# Altium PCB PCB.PcbDoc
Units mm, origin at the board's own origin, x right, y up, seen from the top; angles counter-clockwise.
Board outline 49.91 x 26.92 mm, 2 copper layers (Top Layer, Bottom Layer); 20 components, 16 nets, 48 pads, 3 vias.
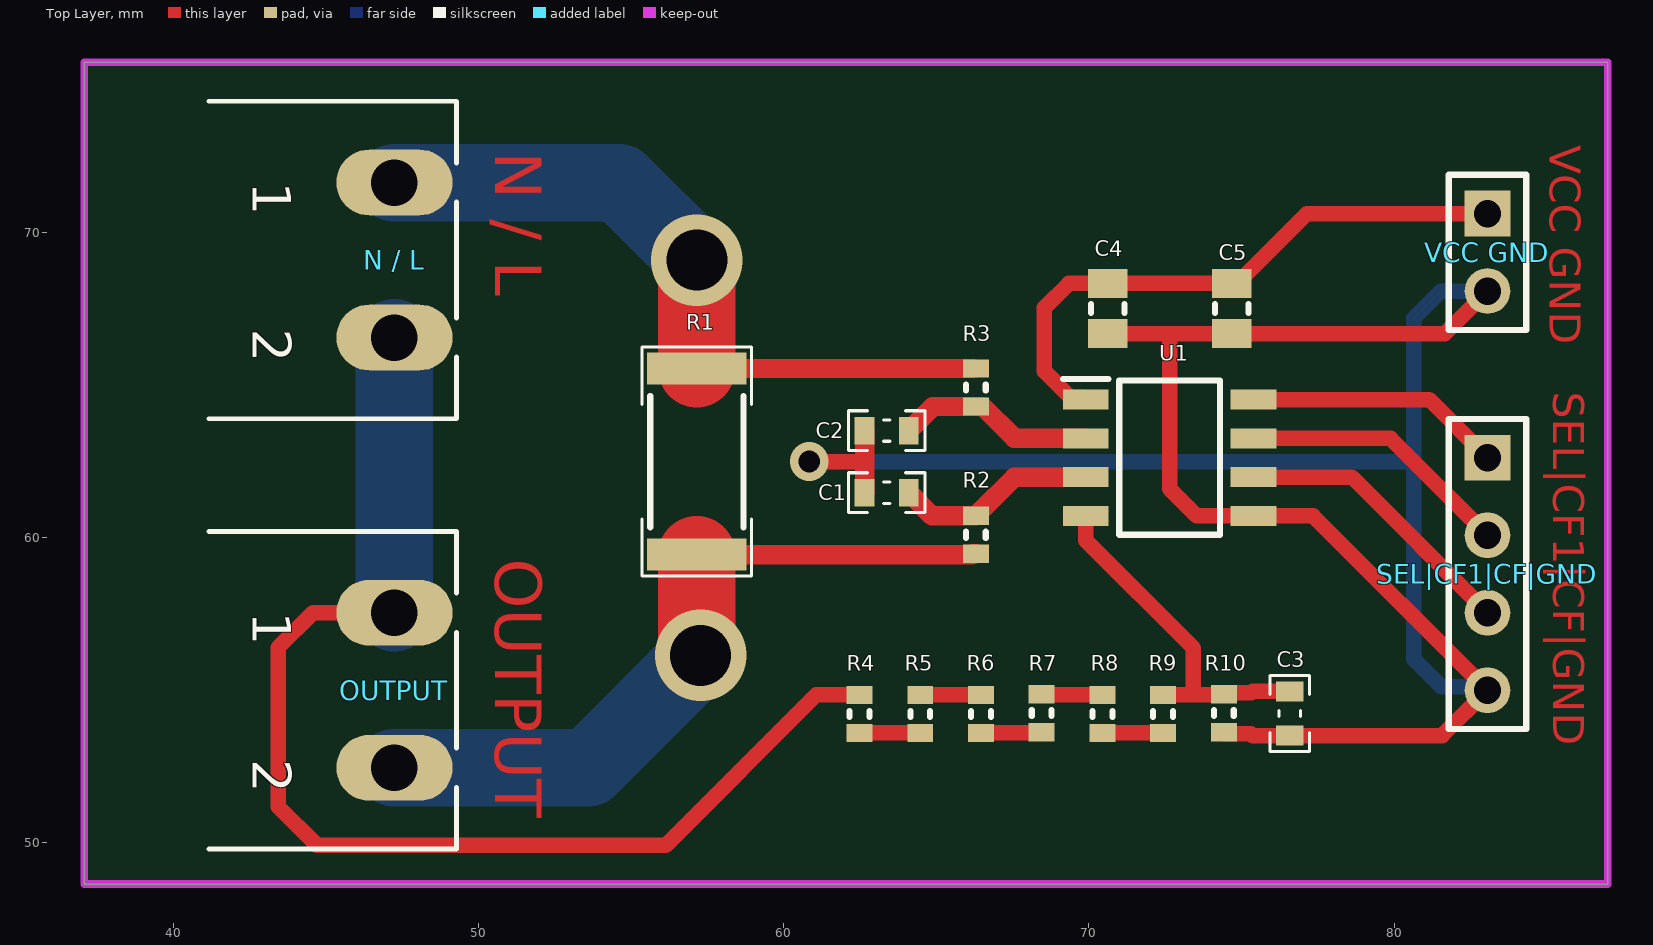
[diagram p0: Top Layer view]
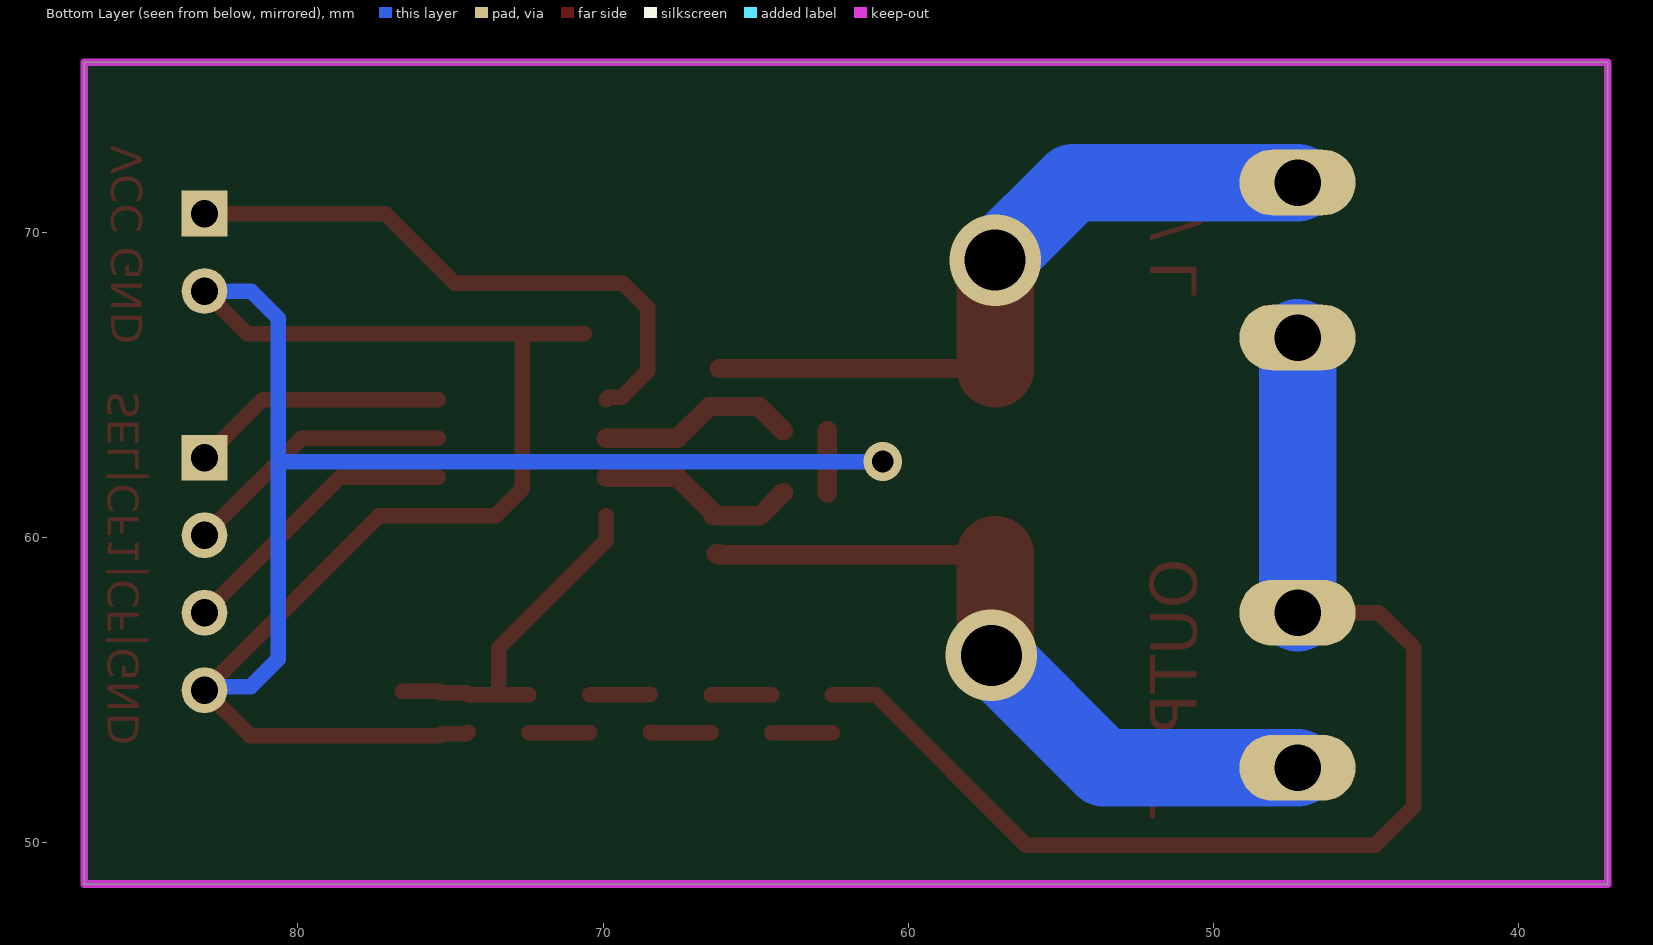
[diagram p1: Bottom Layer view, seen from below]
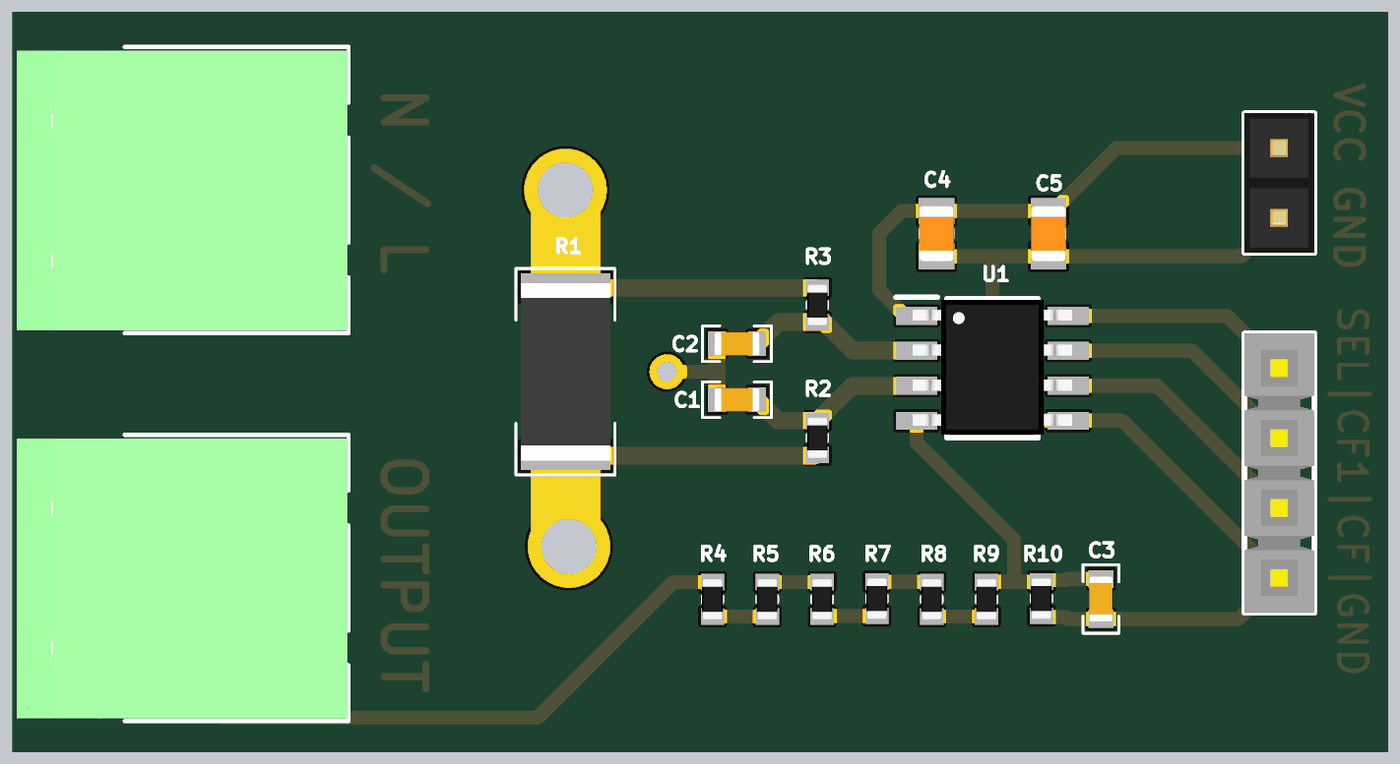
[diagram p2: 3D render of the assembled board from above, using the file's embedded part models]

## Layer stack, top to bottom
Top Solder: solder mask 0.0102, Solder Resist, Dk 3.5
Top Layer: signal copper 0.0356
Dielectric 1: dielectric 0.32, FR-4, Dk 4.8
Bottom Layer: signal copper 0.0356
Bottom Solder: solder mask 0.0102, Solder Resist, Dk 3.5

## Board outline
37.084,48.641 37.084,75.565 86.995,75.565 86.995,48.641

## Design rules (kind name [scope] priority, off if disabled: settings)
Clearance [All] p1: gap=0.254 ignorepadtopadclearanceinfootprint=FALSE except(0: Arc-Hole Track-Hole SMDPad-Hole THPad-Hole Via-Hole Fill-Hole Poly-Hole Region-Hole Text-Hole)
PolygonConnect [All] p1: connectstyle=Relief reliefconductorwidth=0.254 reliefentries=4 polygonreliefangle="90 Angle" airgapwidth=0.254
RoutingVias [All] p1: holewidth=0.711 width=1.27 viastyle="Through Hole" minholewidth=0.711 minwidth=1.27 maxholewidth=2 maxwidth=3
SolderMaskExpansion [All] p1: expansion=0.102 istentingtop=FALSE
Width [All] p1: maxlimit=5.08 minlimit=0.254 preferedwidth=0.508
30 further rules are at their usual default settings.

## Components (designator, comment, footprint, x,y, rotation, side; value= is the part's Value field where it differs from the comment)
C1 "33nF" CAP0603 63.373,61.468 r0 top value=100nF
C2 "33nF" CAP0603 63.373,63.5 r0 top value=100nF
C3 "100nF" CAP0603 76.581,54.229 r90 top
C4 "100nF" CAP805 70.612,66.675 r90 top
C5 "10uF" CAP805 74.676,66.675 r90 top value=100nF
"N / L" "PHOENIX" "MSTB 2,5/2-G-5,08" 47.244,69.088 r270 top
OUTPUT "PHOENIX" "MSTB 2,5/2-G-5,08" 47.244,54.991 r270 top
R1 "1m" RES2512 57.15,62.484 r270 top
R2 "1K" RES0603_(1608X06L) 66.294,60.706 r270 top
R3 "1K" RES0603_(1608X06L) 66.294,64.288 r90 top
R4 "470K" RES0603_(1608X06L) 62.484,54.838 r270 top
R5 "470K" RES0603_(1608X06L) 64.473,53.594 r90 top
R6 "470K" RES0603_(1608X06L) 66.462,54.838 r270 top
R7 "470K" RES0603_(1608X06L) 68.451,53.62 r90 top
R8 "470K" RES0603_(1608X06L) 70.44,54.838 r270 top
R9 "470K" RES0603_(1608X06L) 72.429,53.594 r90 top
R10 "1K" RES0603_(1608X06L) 74.419,53.62 r90 top
SEL|CF1|CF|GND "Header 4" HDR1X4 83.058,62.611 r270 top (schematic designator SEL/CF1/CF/GND)
U1 "HLW8012" SOIC127P600X170-8N 72.644,62.611 r0 top
"VCC GND" "Header 2" HDR1X2 83.058,70.612 r270 top

## Footprints (in the part's own frame and the unit in brackets; to place one, negate y for a bottom-side part, rotate by r counter-clockwise, add the part's x,y. Pads: shape width x height; smd on the part's side, far side on the other; paste and mask are expansions set on the pad)
CAP0603 [mm] "Chip Capacitor, 2-Leads, Body 1/60x0/80mm, IPC Medium Density DESIGNER:ABBAS BASEREH"
  rect 0.65x0.9 smd: 1(-0.725,0) 2(0.725,0)
  silkscreen extent -1.25,-0.65 1.25,0.65, body extent -0.82,-0.43 0.82,0.43, height 0.4
CAP805 [mm]
  rect 0.95x1.3 smd: 1(0,0) 2(1.65,0)
  silkscreen extent 0.67,-0.55 0.97,0.55, body extent -0.19,-0.63 1.84,0.63, height 0.65
HDR1X2 [mm] "Connector; Header; 2 Position"
  rect 1.5x1.5 hole 0.9: 1(0,0)
  round 1.5 hole 0.9: 2(2.54,0)
  silkscreen extent -1.27,-1.27 3.81,1.27, body extent -1.27,-1.28 3.81,1.26, height 8.79
HDR1X4 [mm] "Connector; Header; 4 Position"
  rect 1.5x1.5 hole 0.9: 1(0,0)
  round 1.5 hole 0.9: 2(2.54,0) 3(5.08,0) 4(7.62,0)
  silkscreen extent -1.27,-1.27 8.89,1.27, body extent -1.27,-1.28 8.89,1.26, height 8.38
"MSTB 2,5/2-G-5,08" [mil] "Header, Nominal current: 12 A Rated voltage (III/2): 320 V Number of positions: 2 Pitch: 5.08 mm Color: green Contact surface: Tin Assembly: Soldering DESIGNER:ABBAS BASEREH"
  oval 85x150 hole 60: 1(-100,0) 2(100,0)
  silkscreen extent -205,-240 205,80, body extent -199,-394 201,79, height 340
RES0603_(1608X06L) [mm] "Chip Resistor, 2-Leads, Body 1.6x0.8mm, IPC High Density _ (0.063W)"
  rect 0.6x0.85 smd: 1(0,0) 2(1.244,0)
  silkscreen extent 0.52,-0.33 0.72,0.33, body extent -0.14,-0.38 1.38,0.38, height 0.45
RES2512 [mm] "Chip Resistor, 2-Leads, Body 6/40x3/20mm, IPC Medium Density DESIGNER:ABBAS BASEREH"
  rect 1.05x3.25 smd: 1(-3.05,0) 2(3.05,0)
  silkscreen extent -3.75,-1.8 3.75,1.8, body extent -3.22,-1.63 3.22,1.63, height 0.7
SOIC127P600X170-8N [mm]
  rect 1.5x0.65 smd: 1(-2.75,1.905) 2(-2.75,0.635) 3(-2.75,-0.635) 4(-2.75,-1.905) 5(2.75,-1.905) 6(2.75,-0.635) 7(2.75,0.635) 8(2.75,1.905)
  silkscreen extent -3.5,-2.52 1.65,2.58, body extent -2.89,-2.41 2.89,2.49, height 1.45

## Part data
C1 C2 C3 C4 C5: library part "CAP SMD PACKAGE", "TOTAL CAPACITOR SMD PACK", Data=2017-3-10, Desc.="CAP SMD TOTAL PACKAGES", Designer="Abbas Basereh"
"N / L" OUTPUT: library part CON_Phoenix_MSTB_02, "2 Pitch: 5.08 mm Color: green Contact surface: Tin Assembly", Manufacturer="PHOENIX CONTACT", Max Current="12 A", Voltage="320 V", Category=Connector, ComponentLink1Description="Header, Nominal current: 12 A Rated voltage (III/2): 320 V Number of positions: 2 Pitch: 5.08 mm Color: green Contact surface: Tin Assembly: Soldering  DESIGNER:ABBAS BASEREH", ComponentLink2Description=Reference, Connector type="PCB Terminal Block", Designer="ABBAS BASEREH", Mounting Technology=Through-Hole, PART.NO=PHOENIX, Pin Count=2, Positions=2, Revision 1=2017-3-1, Status=Unreleased
R1 R2 R3 R4 R5 R6 R7 R8 R9 R10: library part "RES SMD PACKAGE", "TOTAL SMD RESISTOR PACK", Data=2017-3-10, Desc.="RES SMD PAKAGES", Designer="Abbas Basereh"
SEL|CF1|CF|GND: "Header, 4-Pin", LatestRevisionDate=17-Jul-2002, LatestRevisionNote="Re-released for DXP Platform.", Publisher="Altium Limited"
U1: "single phase energy monitor chip", Manufacturer_Name=Hilwi, Datasheet Link=https://www.datasheet4u.com/datasheet-parts/HLW8012-datasheet.php?id=1157559, Geometry.Height=1.7mm, Manufacturer_Part_Number=HLW8012
"VCC GND": "Header, 2-Pin", LatestRevisionDate=17-Jul-2002, LatestRevisionNote="Re-released for DXP Platform.", Publisher="Altium Limited"

## Via types
v1: diameter 3, hole 2, Top Layer to Bottom Layer, 2 vias
v2: diameter 1.27, hole 0.711, Top Layer to Bottom Layer, 1 vias

## Nets (pads, with @x,y where several pads share a name; then routed paths per layer and width w, separated by ;. In a path a pad name is that pad's centre, name@x,y a point inside that pad or via, vN(x,y) a via of type N, cw(c..) or ccw(c..) an arc to the next point about the centre after c; other vN are vias at no path point)
GND: "VCC GND.2" C1.1 C2.1 C3.1 C4.1 C5.1 R10.1 SEL|CF1|CF|GND.4 U1.5 | length 81
  Top Layer w0.508: v2(60.833,62.484) 62.648,62.484 ; C4.1 72.644,66.675 ; R10.1 74.465,53.574 75.299,53.574 75.369,53.504 C3.1 81.571,53.504 SEL|CF1|CF|GND.4 77.343,60.706 U1.5 73.533,60.706 72.644,61.595 72.644,66.675 ; 83.058,68.072 81.661,66.675 C5.1 72.644,66.675
  Top Layer w0.635: C1.1 62.648,62.484 C2.1
  Bottom Layer w0.508: v2(60.833,62.484) 80.645,62.484 ; SEL|CF1|CF|GND.4 82.943,55.106 81.546,55.106 80.645,56.007 80.645,62.484 ; 83.058,68.072 81.534,68.072 80.645,67.183 80.645,62.484
L-IN: "N / L.2" OUTPUT.1 R4.1 | length 40.1
  Top Layer w0.508: OUTPUT.1 44.577,57.531 43.434,56.388 43.434,51.181 44.703,49.912 56.135,49.912 61.061,54.838 R4.1
  Bottom Layer w2.54: OUTPUT.1 47.244,66.548
L-OUT: OUTPUT.2 R1.2 R2.2 | length 24.1
  Top Layer w0.635: R1.2 66.176,59.434 66.204,59.462 R2.2
  Top Layer w2.54: R1.2 57.15,56.261 v1(57.277,56.134)
  Bottom Layer w2.54: OUTPUT.2 53.594,52.451 v1(57.277,56.134)
N: "N / L.1" R1.1 R3.2 | length 23.5
  Top Layer w0.635: R1.1 R3.2@66.186,65.534
  Top Layer w2.54: R1.1 v1(57.15,69.088)
  Bottom Layer w2.54: 47.244,71.628 54.61,71.628 v1(57.15,69.088)
NetC1_2: C1.2 R2.1 U1.3 | length 6.6
  Top Layer w0.635: C1.2 64.86,60.706 R2.1 ; R2.1@66.402,60.724 66.402,60.813 67.557,61.968 69.886,61.968 U1.3
NetC2_2: C2.2 R3.1 U1.2 | length 6.6
  Top Layer w0.635: C2.2 64.886,64.288 R3.1@66.384,64.288 ; R3.1 66.522,64.288 67.557,63.254 69.886,63.254 U1.2
NetC3_2: C3.2 R9.2 R10.2 U1.4 | length 11.5
  Top Layer w0.508: U1.4 69.894,59.9 73.424,56.37 73.424,54.851 ; R9.2 72.442,54.851 73.424,54.851 ; C3.2 75.369,54.954 75.325,54.91 74.465,54.91 R10.2 74.406,54.851 73.424,54.851
NetR4_2: R4.2 R5.1 | length 2
  Top Layer w0.508: R4.2 R5.1
NetR5_2: R5.2 R6.1 | length 2
  Top Layer w0.508: R5.2 R6.1
NetR6_2: R6.2 R7.1 | length 2
  Top Layer w0.508: R6.2 66.475,53.607 68.438,53.607 R7.1
NetR7_2: R7.2 R8.1 | length 2
  Top Layer w0.508: R7.2 68.464,54.851 70.428,54.851 R8.1
NetR8_2: R8.2 R9.1 | length 2
  Top Layer w0.508: R8.2 R9.1
NetSEL: SEL|CF1|CF|GND.3 U1.6 | length 9.5
  Top Layer w0.508: U1.6 78.613,61.976 SEL|CF1|CF|GND.3
NetSEL: SEL|CF1|CF|GND.2 U1.7 | length 9
  Top Layer w0.508: U1.7 79.883,63.246 SEL|CF1|CF|GND.2
NetSEL: SEL|CF1|CF|GND.1 U1.8 | length 8.5
  Top Layer w0.508: U1.8 81.153,64.516 SEL|CF1|CF|GND.1
VCC: "VCC GND.1" C4.2 C5.2 U1.1 | length 19.6
  Top Layer w0.508: U1.1 69.823,64.587 69.398,64.587 68.536,65.449 68.536,67.52 69.341,68.325 C4.2 C5.2 74.851,68.325 77.138,70.612 83.058,70.612

## Keep-outs
Keep-Out Layer:
  the board outline again, w0.254

## Text inside footprints (layer, text, board x,y; h text height)
"N / L": Top Overlay "2" at 42.609,66.834 h1.27 r270; Top Overlay "1" at 42.609,71.66 h1.27 r270
OUTPUT: Top Overlay "2" at 42.609,52.737 h1.27 r270; Top Overlay "1" at 42.609,57.563 h1.27 r270